# Altium PCB interface.PcbDoc (part 2 of 2)
Units mm, origin at the board's own origin, x right, y up, seen from the top; angles counter-clockwise.
Board outline 152.4 x 101.6 mm, 4 copper layers (Top Layer 1, Top Layer, Bottom Layer, Bottom Layer 1), stack 1.483 mm thick; 90 components, 76 nets, 332 pads, 20 vias.
Unrouted connection lines stored in the file: 69.
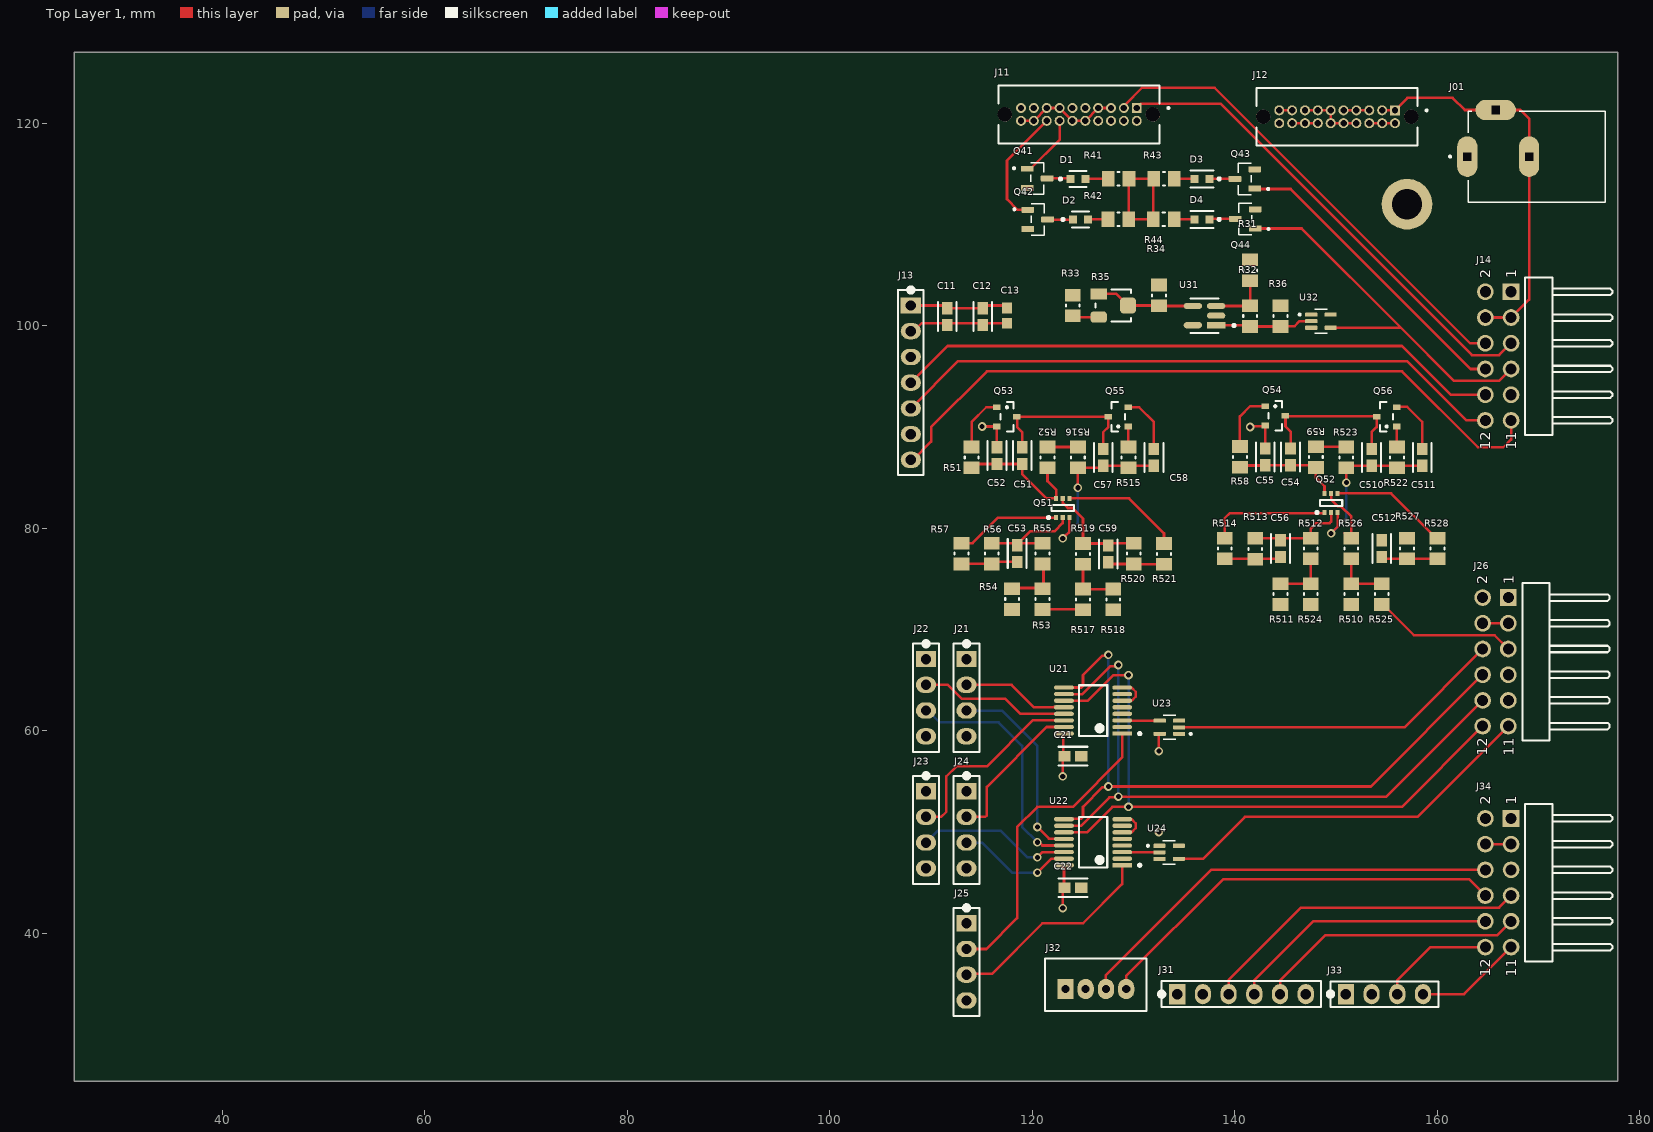
[diagram p0: Top Layer 1 view]

## Via types
v1: diameter 0.85, hole 0.5, Top Layer 1 to Bottom Layer 1, 18 vias
v2: diameter 0.85/0.85/0.85/0.85 (per signal layer), hole 0.5, Top Layer 1 to Bottom Layer 1, 2 vias

## Nets (pads, with @x,y where several pads share a name; then routed paths per layer and width w, separated by ;. In a path a pad name is that pad's centre, name@x,y a point inside that pad or via, vN(x,y) a via of type N, cw(c..) or ccw(c..) an arc to the next point about the centre after c; other vN are vias at no path point) (continued)
NetR33_1: (continued)
  Top Layer 1 w0.254: R33.1 124.125,100.85 R35.2
NetR34_2: R34.2 R35.1 R35.3 U31.4 | length 9.8
  Top Layer 1 w0.254: R35.1 128.3,103.15 R35.3 132.475,102 132.525,101.95 U31.4
NetR53_1: R53.1 R54.2 R55.1 | length 5.6
  Top Layer 1 w0.254: R54.2 118.075,74.1 120.925,74.1 R53.1 ; R53.1@121.1,74.125 R55.1@121.1,76.375 ; R55.1@121.1,76.375 R55.1 R55.1@121.1,76.375
NetR510_1: R510.1 R511.2 R512.1 | length 5.5
  Top Layer 1 w0.254: R511.2 R510.1 R512.1
NetR517_1: R517.1 R518.2 R519.1 | length 5.5
  Top Layer 1 w0.254: R519.1 R517.1 R518.2
NetR524_1: R524.1 R525.2 R526.1 | length 5.5
  Top Layer 1 w0.254: R526.1 R524.1 R525.2
NFC_FD: J31.3 J34.7 | length 32.7
  Top Layer 1 w0.254: J31.3 139.38,35.38 146.549,42.549 166.089,42.549 J34.7
NFC_I2C_SCL: J31.5 J34.9 | length 26.6
  Top Layer 1 w0.254: J31.5 144.5,34.04 144.5,35.381 148.95,39.831 165.911,39.831 J34.9
NFC_I2C_SDA: J31.4 J34.10 | length 26.6
  Top Layer 1 w0.254: J31.4 141.92,35.381 147.729,41.19 J34.10
PWR_MGT_GSM: J26.7 R518.1
PWR_MGT_NFC: J26.5 R525.1 | length 14.3
  Top Layer 1 w0.254: R525.1 154.65,72.475 157.686,69.439 165.641,69.439 J26.5
PWR_MGT_US: J26.9 R54.1 R511.1
US_1_ECHO_5V: J21.3 U22.12 | length 19.6
  Top Layer 1 w0.254: v1(120.5,50.5) 121.643,49.357 123.093,49.357 U22.12
  Bottom Layer 1 w0.254: J21.3 117,62 120.5,58.5 v1(120.5,50.5)
US_1_TRIG_5V: J21.2 U21.12 | length 10.6
  Top Layer 1 w0.254: J21.2 117.96,64.54 120.175,62.325 U21.12@122.174,62.325 ; U21.12@122.174,62.357 123.093,62.357 U21.12
US_2_ECHO_5V: J22.3 U22.13 | length 23.8
  Top Layer 1 w0.254: v1(120.5,49) 120.661,49 120.986,48.675 U22.13
  Bottom Layer 1 w0.254: J22.3 109.7,62 110.856,60.844 116.656,60.844 119,58.5 119,50.5 v1(120.5,49)
US_2_TRIG_5V: J22.2 U21.13 | length 14.8
  Top Layer 1 w0.254: J22.2 111.665,64.54 113.049,63.156 117.344,63.156 118.825,61.675 U21.13
US_3_ECHO_5V: J23.3 U22.14 | length 15.4
  Top Layer 1 w0.254: v1(120.5,47.5) 121.025,48.025 U22.14
  Bottom Layer 1 w0.254: J23.3 110.656,50.116 116.884,50.116 119.5,47.5 v1(120.5,47.5)
US_3_TRIG_5V: J23.2 U21.14 | length 19.6
  Top Layer 1 w0.254: J23.2 111,51.5 111.5,52 111.5,55.5 112.5,56.5 115.5,56.5 120.025,61.025 U21.14
US_4_ECHO_5V: J24.3 U22.15 | length 11.4
  Top Layer 1 w0.254: v1(120.5,46) 121.875,47.375 U22.15
  Bottom Layer 1 w0.254: J24.3 115.04,48.96 118,46 v1(120.5,46)
US_4_TRIG_5V: J24.2 U21.15 | length 14.9
  Top Layer 1 w0.254: J24.2 115.351,51.5 115.5,51.649 115.5,54.455 121.42,60.375 U21.15
US_5_ECHO_5V: J25.3 U22.1 | length 20.9
  Top Layer 1 w0.254: J25.3 113.58,36 116,36 121,41 125,41 128.875,44.875 U22.1
US_5_TRIG_5V: J25.2 U21.1 | length 30.8
  Top Layer 1 w0.254: J25.2 115.46,38.46 118.5,41.5 118.5,50.5 120.5,52.5 124,52.5 128.875,57.375 U21.1
US_ECHO_3V3: J26.11 U24.4 | length 38
  Top Layer 1 w0.254: U24.4 136.85,47.35 141,51.5 158.04,51.5 J26.11
US_ECHO_5V: U22.3 U24.2 | length 3.7
  Top Layer 1 w0.254: U22.3 128.888,48.013 132.528,48.013 U24.2
US_SEL_0: J26.12 U21.11 U22.11 | length 66.1
  Top Layer 1 w0.254: U22.11 125.391,49.975 127.916,52.5 156.5,52.5 J26.12 ; U21.11 125.475,62.975 128,65.5 v1(129.5,65.5)
  Bottom Layer 1 w0.254: v1(129.5,52.5) v1(129.5,65.5)
US_SEL_1: J26.10 U21.10 U22.10 | length 66
  Top Layer 1 w0.254: U22.10 124.808,50.625 127.617,53.434 128.434,53.434 v1(128.5,53.5) 154.96,53.5 J26.10 ; U21.10 124.942,63.625 127.703,66.386 128.386,66.386 v1(128.5,66.5)
  Bottom Layer 1 w0.254: v1(128.5,53.5) v1(128.5,66.5)
US_SEL_2: J26.8 U21.9 U22.9 | length 67.2
  Top Layer 1 w0.254: U22.9 123.157,51.307 124.807,51.307 125,51.5 125,52.5 126.934,54.434 127.434,54.434 v1(127.5,54.5) 153.42,54.5 J26.8 ; U21.9 124.851,64.275 125,64.424 125,65.5 126.934,67.434 127.434,67.434 v1(127.5,67.5)
  Bottom Layer 1 w0.254: v1(127.5,54.5) v1(127.5,67.5)
US_TRIG_3V3: J26.6 U23.2 | length 33.2
  Top Layer 1 w0.254: U23.2 156.73,60.35 J26.6
US_TRIG_5V: U21.3 U23.4 | length 3.7
  Top Layer 1 w0.254: U21.3 128.888,61.013 132.568,61.013 U23.4
pads on no net: J11. J11.2 J11.4 J11.6 J11.8 J11.9 J11.11 J11.17 J11.19 J12. J14.1 J14.2 J14.9 J26.1 J26.2 J34.1 J34.2 J34.5 U21.2 U21.4 U21.5 U21.7 U22.2 U22.4 U22.5 U22.7 U23.1 U24.1 U32.1

## Polygon pours and split planes (outlines as drawn)
GND on Bottom Layer "GND_L03_P000" (solid, pour order 0): 105,27.5 105,125 177.5,125 177.5,27.5

## Text inside footprints (layer, text, board x,y; h text height)
J14: Top Overlay "11" at 167.8,87.73 h1.02 r90; Top Overlay "12" at 165.2,87.73 h1.02 r90; Top Overlay "2" at 165.2,104.68 h1.02 r90; Top Overlay "1" at 167.8,104.68 h1.02 r90
J26: Top Overlay "11" at 167.53,57.54 h1.02 r90; Top Overlay "12" at 164.93,57.54 h1.02 r90; Top Overlay "2" at 164.93,74.49 h1.02 r90; Top Overlay "1" at 167.53,74.49 h1.02 r90
J34: Top Overlay "11" at 167.8,35.73 h1.02 r90; Top Overlay "12" at 165.2,35.73 h1.02 r90; Top Overlay "2" at 165.2,52.68 h1.02 r90; Top Overlay "1" at 167.8,52.68 h1.02 r90